# Altium PCB PCB1.PcbDoc
Units mm, origin at the board's own origin, x right, y up, seen from the top; angles counter-clockwise.
Board outline 16 x 16 mm, 2 copper layers (Top Layer, Bottom Layer); 2 components, 4 nets, 10 pads, 0 vias.
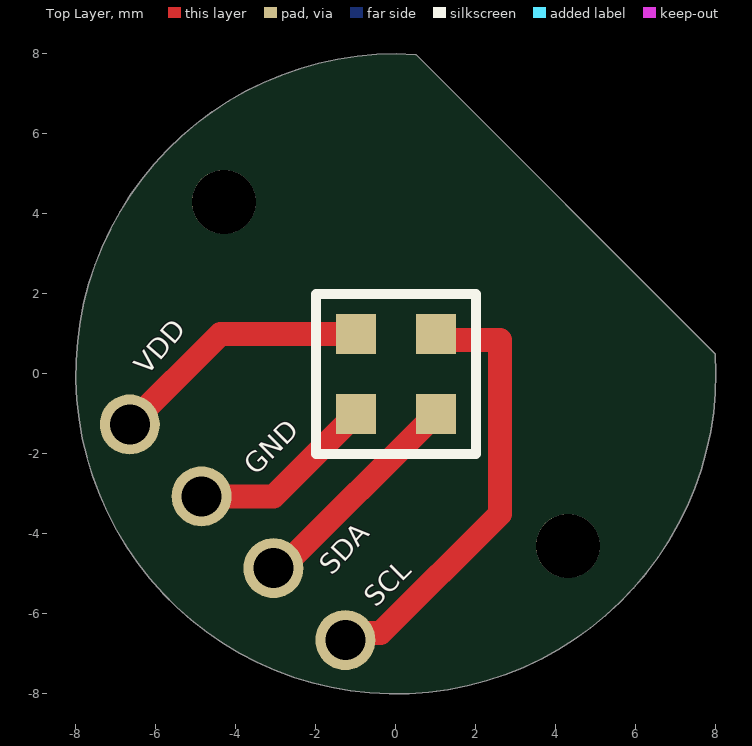
[diagram p0: Top Layer view]
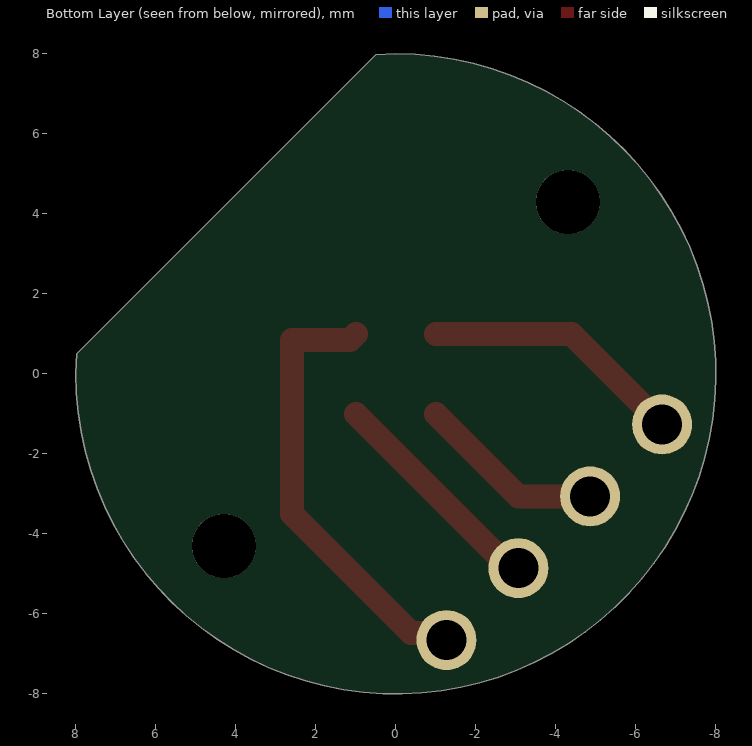
[diagram p1: Bottom Layer view, seen from below]

## Layer stack, top to bottom
Top Solder: solder mask 0.0102, Solder Resist, Dk 3.5
Top Layer: signal copper 0.0356
Dielectric 1: dielectric 0.32, FR-4, Dk 4.8
Bottom Layer: signal copper 0.0356
Bottom Solder: solder mask 0.0102, Solder Resist, Dk 3.5

## Board outline
7.984,0.501 cw(c0,0) 0.501,7.984

## Design rules (kind name [scope] priority, off if disabled: settings)
Clearance [All] p1: gap=0.254 ignorepadtopadclearanceinfootprint=FALSE except(0: Arc-Hole Track-Hole SMDPad-Hole THPad-Hole Via-Hole Fill-Hole Poly-Hole Region-Hole Text-Hole)
PolygonConnect [All] p1: connectstyle=Relief reliefconductorwidth=0.254 reliefentries=4 polygonreliefangle="90 Angle" airgapwidth=0.254
RoomDefinition Sheet1 [InComponentClass('Sheet1')] p1: confinementstyle=ConfineIn formatcopy=TRUE lockcomponents=FALSE outline 9.6,-7.9 18.2,-7.9 18.2,5.3 9.6,5.3
RoutingVias [All] p1: holewidth=0.711 width=1.27 viastyle="Through Hole" minholewidth=0.711 minwidth=1.27 maxholewidth=0.711 maxwidth=1.27
SolderMaskExpansion [All] p1: expansion=0.102 istentingtop=FALSE
Width [All] p1: maxlimit=0.254 minlimit=0.254 preferedwidth=0.254
30 further rules are at their usual default settings.

## Components (designator, comment, footprint, x,y, rotation, side; value= is the part's Value field where it differs from the comment)
Pins1 "MCU_PINS" PIN_ROW -3.958,-3.958 r315 top
PS1 "Pres_Sensor" Pressure_Footprint 0,0 r0 top

## Footprints (in the part's own frame and the unit in brackets; to place one, negate y for a bottom-side part, rotate by r counter-clockwise, add the part's x,y. Pads: shape width x height; smd on the part's side, far side on the other; paste and mask are expansions set on the pad)
PIN_ROW [mm]
  round 1.5 hole 1: 1(-1.27,0) 2(-3.81,0) 3(3.81,0) 4(1.27,0)
Pressure_Footprint [mm]
  rect 1x1 smd: 1(-1,-1) 2(-1,1) 3(1,1) 4(1,-1)
  silkscreen extent -2,-2 2,2

## Free pads (board coordinates)
  round 1.6 hole 1.6: 11(-4.3,4.3) 11(4.3,-4.3)

## Nets (pads, with @x,y where several pads share a name; then routed paths per layer and width w, separated by ;. In a path a pad name is that pad's centre, name@x,y a point inside that pad or via, vN(x,y) a via of type N, cw(c..) or ccw(c..) an arc to the next point about the centre after c; other vN are vias at no path point)
NetPINS1_1: Pins1.1 PS1.1 | length 4.7
  Top Layer w0.6: Pins1.1 -3.06,-3.06 PS1.1
NetPINS1_2: Pins1.2 PS1.2 | length 6.6
  Top Layer w0.6: Pins1.2 -4.388,1 PS1.2
NetPINS1_3: Pins1.3 PS1.3 | length 11.4
  Top Layer w0.254: 2.451,1 2.6,0.851
  Top Layer w0.6: Pins1.3 -1.092,-6.48 -0.38,-6.48 2.6,-3.5 2.6,0.851 1.149,0.851 PS1.3
NetPINS1_4: Pins1.4 PS1.4 | length 5.7
  Top Layer w0.254: Pins1.4 Pins1.4@-2.856,-4.857
  Top Layer w0.6: Pins1.4@-2.856,-4.857 PS1.4

## Silkscreen, mask and mechanical layers (free items; w line width, h text height)
Mechanical 1:
  the board outline again, w0.254

## Text inside footprints (layer, text, board x,y; h text height)
Pins1: Top Overlay "GND" at -3.5,-2.559 h0.5 r45; Top Overlay "SDA" at -1.606,-5.059 h0.5 r47.25; Top Overlay "SCL" at -0.499,-5.859 h0.5 r44.71; Top Overlay "VDD" at -6.21,-0.059 h0.5 r49.22